# Altium PCB geiger counter.PcbDoc
Units mil, origin at the board's own origin, x right, y up, seen from the top; angles counter-clockwise.
Board outline 2765.94 x 1899.81 mil, 2 copper layers (Top Layer, Bottom Layer), stack 65.792 mil thick; 95 components, 66 nets, 339 pads, 179 vias.
Unrouted connection lines stored in the file: 1.
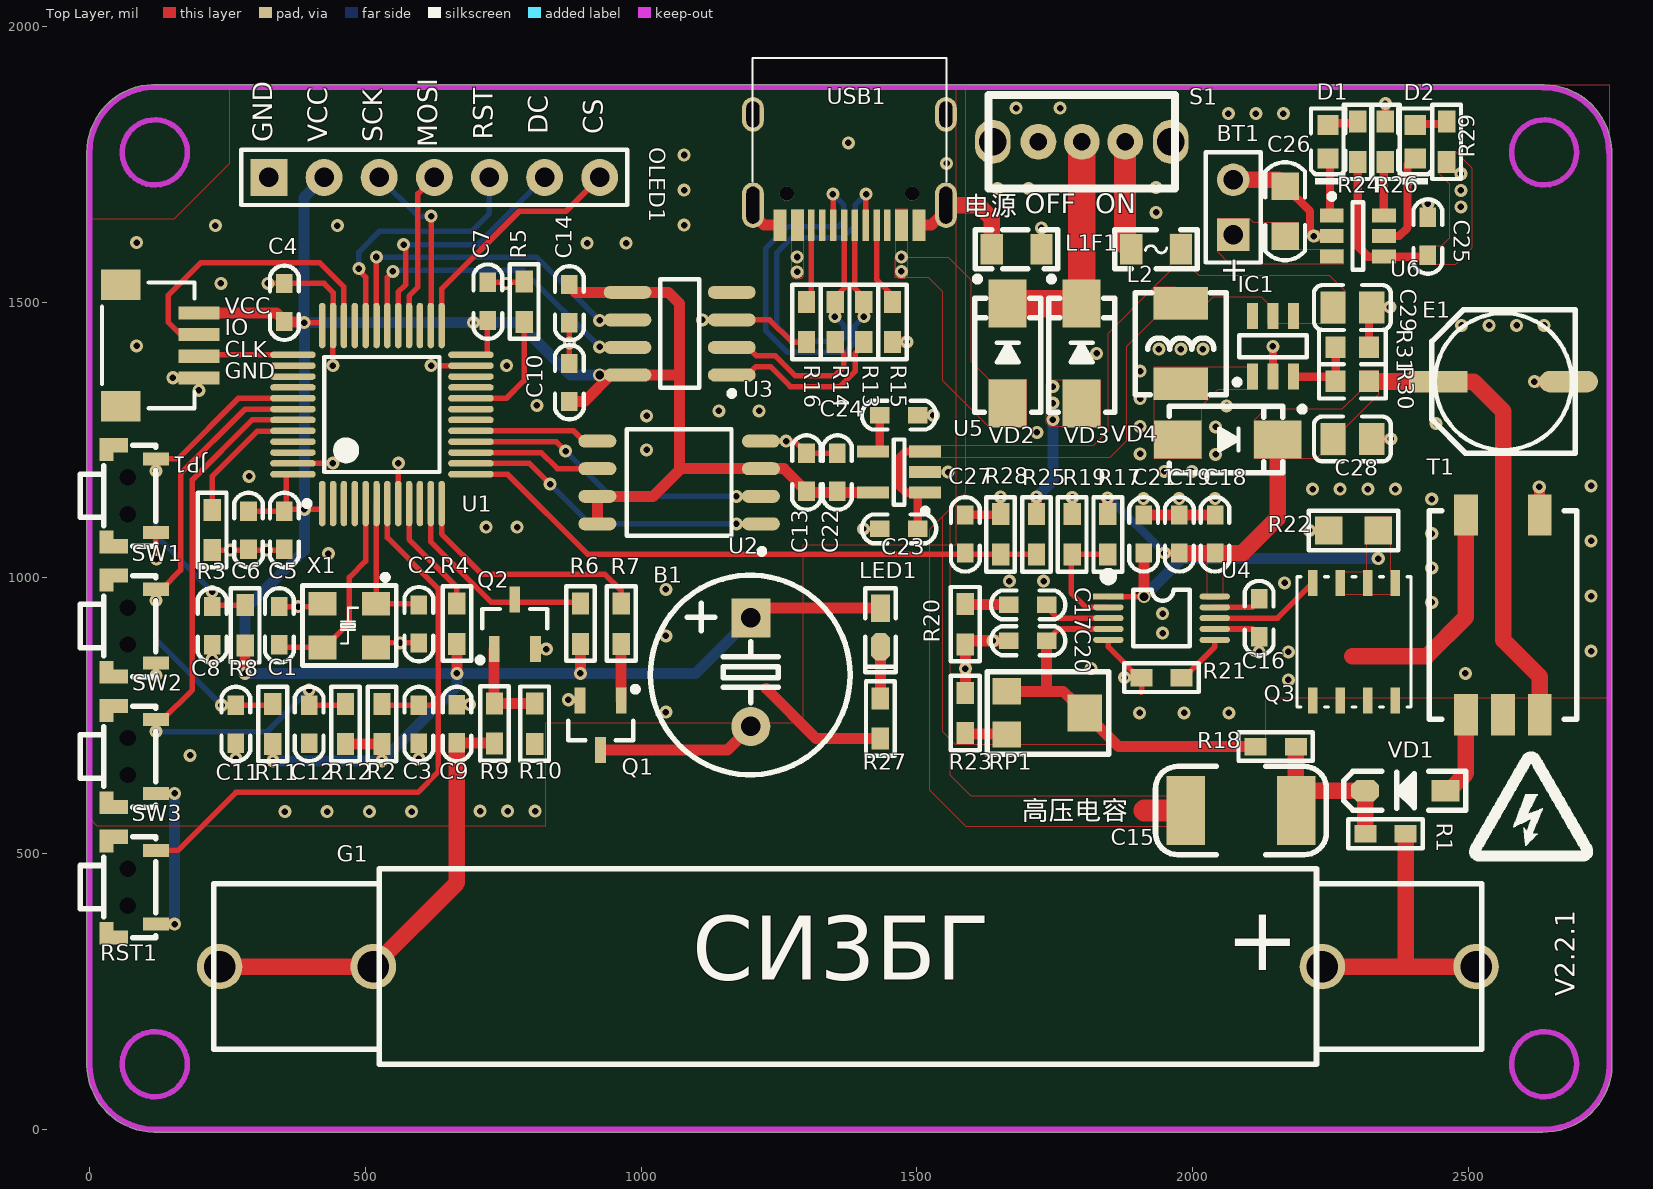
[diagram p0: Top Layer view]
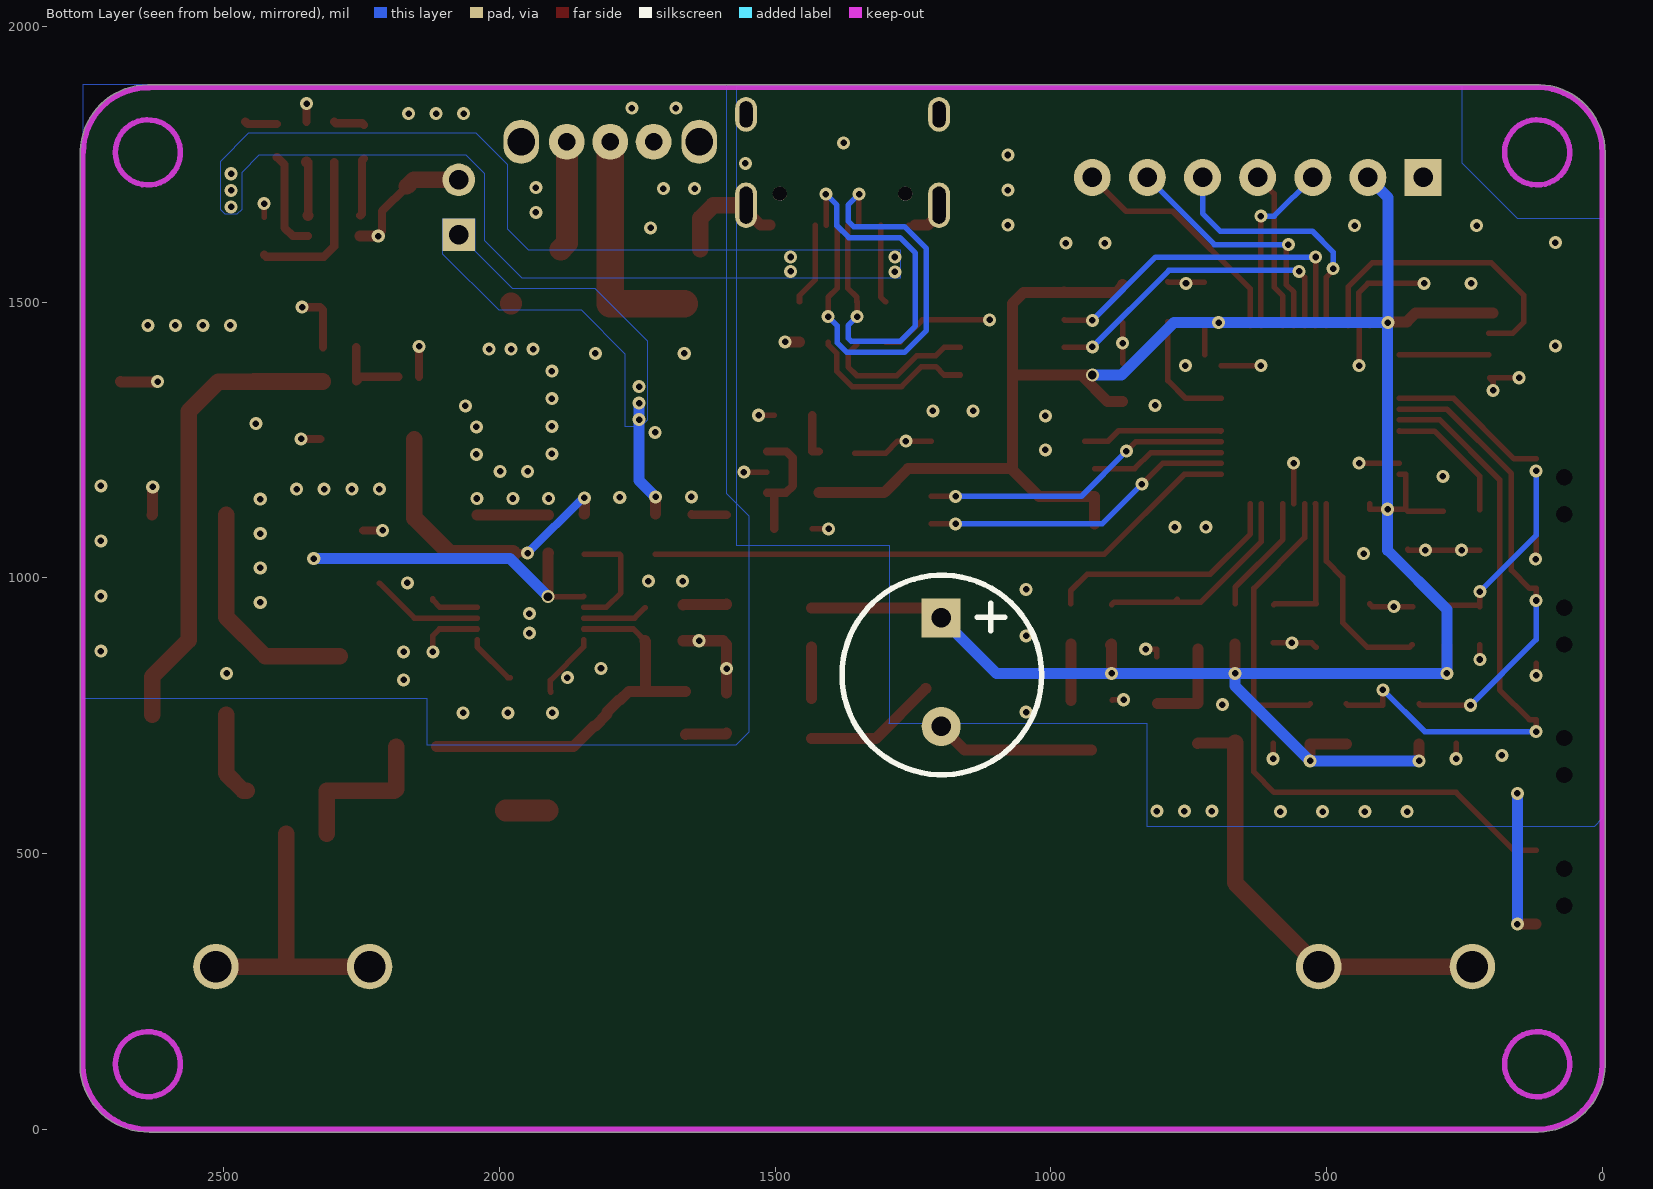
[diagram p1: Bottom Layer view, seen from below]

## Layer stack, top to bottom
Top Solder: solder mask 0.4, Solder Resist, Dk 3.5
Top Layer: signal copper 1.4
Dielectric 1: dielectric 62.9921, FR-4, Dk 4.8
Bottom Layer: signal copper 1.4
Bottom Solder: solder mask 0.4, Solder Resist, Dk 3.5

## Board outline
116.1,-5.01 cw(c118.11,118.11) -5.01,116.08 cw(c118.11,118.11) -5.01,116.18 -5.01,116.26 -5.01,1771.26 -5.01,1771.27 cw(c118.11,1771.65) 114.22,1894.72 cw(c115,1889.76) 115,1894.78 2635.05,1894.78 cw(c2635.05,1889.76) 2637.74,1894 cw(c2637.8,1771.65) 2760.11,1774.39 cw(c2755.91,1771.65) 2760.92,1771.65 2760.92,114.98 cw(c2755.91,114.98) 2760.9,114.55 cw(c2637.8,118.11) 2634.96,-5.01 cw(c2637.8,118.11) 2634.9,-5.01 2635.02,-5.01 119.92,-5.01 ccw(c119.92,0) 120,-5.01 cw(c118.11,118.11) 119.96,-5.01 cw(c118.11,118.11) 119.92,-5.02 cw(c118.11,118.11) 116.26,-5.01 cw(c116.26,0)

## Design rules (kind name [scope] priority, off if disabled: settings)
AssemblyTestPointUsage [All] p0: scope1count=1 scope1_0_kind=Board scope1_0_value=Board scope2count=1 scope2_0_kind=Board scope2_0_value=Board commentlength=0
AssemblyTestpoint [All] p0: scope1count=1 scope1_0_kind=Board scope1_0_value=Board scope2count=1 scope2_0_kind=Board scope2_0_value=Board commentlength=0
Clearance [All] p0: scope1count=1 scope1_0_kind=Board scope1_0_value=Board scope2count=1 scope2_0_kind=Board scope2_0_value=Board commentlength=0 gap=6
Clearance [All] p1: gap=6 ignorepadtopadclearanceinfootprint=FALSE except(0: Arc-Hole Track-Hole SMDPad-Hole THPad-Hole Via-Hole Fill-Hole Poly-Hole Region-Hole Text-Hole; 8: Arc-Fill Arc-Poly Arc-Region Track-Fill Track-Poly Track-Region SMDPad-Fill SMDPad-Poly SMDPad-Region THPad-Fill THPad-Poly THPad-Region Via-Fill Via-Poly Via-Region Fill-Fill Fill-Poly Fill-Region Poly-Poly Poly-Region Region-Region)
ComponentClearance [All] p0: scope1count=1 scope1_0_kind=Board scope1_0_value=Board scope2count=1 scope2_0_kind=Board scope2_0_value=Board commentlength=0 gap=0 collisioncheckmode=3
ComponentClearance [All] p1: gap=0 collisioncheckmode=3 verticalgap=0 showdistances=FALSE
DiffPairsRouting [All] p0: scope1count=1 scope1_0_kind=Board scope1_0_value=Board scope2count=1 scope2_0_kind=Board scope2_0_value=Board commentlength=0
DiffPairsRouting [All] p1: maxlimit=10 minlimit=10 mostfreqgap=10 toplayer_minwidth=10 toplayer_maxwidth=15 toplayer_prefwidth=10 bottomlayer_minwidth=10 bottomlayer_maxwidth=15 bottomlayer_prefwidth=10 maxuncoupledlength=500
FabricationTestPointUsage [All] p0: scope1count=1 scope1_0_kind=Board scope1_0_value=Board scope2count=1 scope2_0_kind=Board scope2_0_value=Board commentlength=0 valid=0 allowmultiple=FALSE
FabricationTestpoint [All] p0: scope1count=1 scope1_0_kind=Board scope1_0_value=Board scope2count=1 scope2_0_kind=Board scope2_0_value=Board commentlength=0 side=3 testpointundercomponent=TRUE minsize=40 maxsize=100 preferedsize=60 minholesize=0 maxholesize=40 preferedholesize=32 testpointgrid=1
FanoutControl Fanout_BGA [All] p0 off: scope1count=1 scope1_0_kind=Board scope1_0_value=Board scope2count=1 scope2_0_kind=Board scope2_0_value=Board commentlength=69 // Protel DXP Scope 1 Expression Was: IsBGA   Fanout_BGA (Default Rule)
FanoutControl Fanout_LCC [All] p0 off: scope1count=1 scope1_0_kind=Board scope1_0_value=Board scope2count=1 scope2_0_kind=Board scope2_0_value=Board commentlength=69 // Protel DXP Scope 1 Expression Was: IsLCC   Fanout_LCC (Default Rule)
FanoutControl Fanout_SOIC [All] p0 off: scope1count=1 scope1_0_kind=Board scope1_0_value=Board scope2count=1 scope2_0_kind=Board scope2_0_value=Board commentlength=71 // Protel DXP Scope 1 Expression Was: IsSOIC   Fanout_SOIC (Default Rule)
FanoutControl Fanout_Small [All] p0 off: scope1count=1 scope1_0_kind=Board scope1_0_value=Board scope2count=1 scope2_0_kind=Board scope2_0_value=Board commentlength=84 // Protel DXP Scope 1 Expression Was: (CompPinCount < 5)   Fanout_Small (Default Rule)
FanoutControl Fanout_Default [All] p0: scope1count=1 scope1_0_kind=Board scope1_0_value=Board scope2count=1 scope2_0_kind=Board scope2_0_value=Board commentlength=30 // Fanout_Default (Default Rule)
Height [All] p0: scope1count=1 scope1_0_kind=Board scope1_0_value=Board scope2count=1 scope2_0_kind=Board scope2_0_value=Board commentlength=0
HoleSize [All] p0: scope1count=1 scope1_0_kind=Board scope1_0_value=Board scope2count=1 scope2_0_kind=Board scope2_0_value=Board commentlength=0 absolutevalues=TRUE maxlimit=100 minlimit=1 maxpercent=80.000 minpercent=20.000
HoleToHoleClearance [All] p0: scope1count=1 scope1_0_kind=Board scope1_0_value=Board scope2count=1 scope2_0_kind=Board scope2_0_value=Board commentlength=0
LayerPairs [All] p0: scope1count=1 scope1_0_kind=Board scope1_0_value=Board scope2count=1 scope2_0_kind=Board scope2_0_value=Board commentlength=0 enforce=TRUE
MinimumSolderMaskSliver [All] p0: scope1count=1 scope1_0_kind=Board scope1_0_value=Board scope2count=1 scope2_0_kind=Board scope2_0_value=Board commentlength=0
MinimumSolderMaskSliver [All] p1: minsoldermaskwidth=0
NetAntennae [All] p0: scope1count=1 scope1_0_kind=Board scope1_0_value=Board scope2count=1 scope2_0_kind=Board scope2_0_value=Board commentlength=0
PasteMaskExpansion [All] p0: scope1count=1 scope1_0_kind=Board scope1_0_value=Board scope2count=1 scope2_0_kind=Board scope2_0_value=Board commentlength=0 expansion=0
PlaneClearance [All] p0: scope1count=1 scope1_0_kind=Board scope1_0_value=Board scope2count=1 scope2_0_kind=Board scope2_0_value=Board commentlength=0 clearance=20
PlaneConnect [All] p0: scope1count=1 scope1_0_kind=Board scope1_0_value=Board scope2count=1 scope2_0_kind=Board scope2_0_value=Board commentlength=0 planeconnectstyle=Relief reliefexpansion=20 reliefentries=4 reliefconductorwidth=10 reliefairgap=10
PolygonConnect PolygonConnect_GND [All] p0: scope1count=1 scope1_0_kind=Board scope1_0_value=Board scope2count=1 scope2_0_kind=Board scope2_0_value=Board commentlength=0 connectstyle=Relief reliefconductorwidth=10 reliefentries=4 polygonreliefangle="90 Angle"
PolygonConnect [All] p0 off: scope1count=1 scope1_0_kind=Board scope1_0_value=Board scope2count=1 scope2_0_kind=Board scope2_0_value=Board commentlength=197 connectstyle=Direct reliefconductorwidth=10 reliefentries=4 polygonreliefangle="90 Angle" // Protel DXP Scope 1 Expression Was: (InNet('3.3V') OR InNet('NetF1_1') OR InNet('VIN') OR InNet('VUSB') OR InNet('5V') OR InNet('VCC') OR InNet('NetIC1_1') OR InNet('VBAT') OR InNet('NetC21_2'))
PolygonConnect [(InNet('3.3V') OR InNet('NetF1_1') OR InNet('VIN') OR InNet('VUSB') OR InNet('5V') OR InNet('VCC') OR InNet('NetIC1_1') OR InNet('VBAT') OR InNet('NetC21_2'))] p1: connectstyle=Direct reliefconductorwidth=10 reliefentries=4 polygonreliefangle="90 Angle" airgapwidth=10
PolygonConnect PolygonConnect_GND [All] p2: thpad.connectstyle=Relief thpad.reliefconductorwidth=10 thpad.reliefentries=4 thpad.polygonreliefangle="90 Angle" thpad.airgapwidth=10 smdpad.connectstyle=Relief smdpad.reliefconductorwidth=10 smdpad.reliefentries=4 smdpad.polygonreliefangle="90 Angle" smdpad.airgapwidth=10 via.connectstyle=Direct via.reliefconductorwidth=10 via.reliefentries=4 via.polygonreliefangle="90 Angle" via.airgapwidth=10
RoutingCorners [All] p0: scope1count=1 scope1_0_kind=Board scope1_0_value=Board scope2count=1 scope2_0_kind=Board scope2_0_value=Board commentlength=0 cornerstyle=45-Degree minsetback=100 maxsetback=100
RoutingLayers [All] p0: scope1count=1 scope1_0_kind=Board scope1_0_value=Board scope2count=1 scope2_0_kind=Board scope2_0_value=Board commentlength=0 top layer=Automatic bottom layer=Automatic
RoutingPriority [All] p0: scope1count=1 scope1_0_kind=Board scope1_0_value=Board scope2count=1 scope2_0_kind=Board scope2_0_value=Board commentlength=0
RoutingTopology [All] p0: scope1count=1 scope1_0_kind=Board scope1_0_value=Board scope2count=1 scope2_0_kind=Board scope2_0_value=Board commentlength=0 topology=Shortest
RoutingVias [All] p0: scope1count=1 scope1_0_kind=Board scope1_0_value=Board scope2count=1 scope2_0_kind=Board scope2_0_value=Board commentlength=0 holewidth=11.81 width=23.62 viastyle="Through Hole" minholewidth=11.81 minwidth=23.62 maxholewidth=28 maxwidth=50
RoutingVias [All] p1: holewidth=11.81 width=23.62 viastyle="Through Hole" minholewidth=11.81 minwidth=23.62 maxholewidth=28 maxwidth=50
ShortCircuit [All] p0: scope1count=1 scope1_0_kind=Board scope1_0_value=Board scope2count=1 scope2_0_kind=Board scope2_0_value=Board commentlength=0 allowed=FALSE
SilkToBoardRegionClearance [All] p0: scope1count=1 scope1_0_kind=Board scope1_0_value=Board scope2count=1 scope2_0_kind=Board scope2_0_value=Board commentlength=0
SilkToSilkClearance [All] p0: scope1count=1 scope1_0_kind=Board scope1_0_value=Board scope2count=1 scope2_0_kind=Board scope2_0_value=Board commentlength=0
SilkToSilkClearance [All] p1: silktosilkclearance=0
SilkToSolderMaskClearance [All] p0 off: scope1count=1 scope1_0_kind=Board scope1_0_value=Board scope2count=1 scope2_0_kind=Board scope2_0_value=Board commentlength=44 // Protel DXP Scope 1 Expression Was: IsPad
SilkToSolderMaskClearance [IsPad] p1: minsilkscreentomaskgap=0 clearancetoexposedcopper=TRUE
SolderMaskExpansion [All] p0: scope1count=1 scope1_0_kind=Board scope1_0_value=Board scope2count=1 scope2_0_kind=Board scope2_0_value=Board commentlength=0 expansion=4
SolderMaskExpansion [All] p1: expansion=4
UnRoutedNet [All] p0: scope1count=1 scope1_0_kind=Board scope1_0_value=Board scope2count=1 scope2_0_kind=Board scope2_0_value=Board commentlength=0
UnpouredPolygon [All] p0: scope1count=1 scope1_0_kind=Board scope1_0_value=Board scope2count=1 scope2_0_kind=Board scope2_0_value=Board commentlength=0
Width [All] p0: scope1count=1 scope1_0_kind=Board scope1_0_value=Board scope2count=1 scope2_0_kind=Board scope2_0_value=Board commentlength=0 maxlimit=100 minlimit=6 preferedwidth=10
Width [All] p1: maxlimit=100 minlimit=6 preferedwidth=10
25 further rules are at their usual default settings.

## Classes and differential pairs
component class POWER: BT1 C15 C16 C17 C18 C19 C20 C21 C22 C23 C24 C25 C26 C27 C28 C29 D1 D2 E1 F1 IC1 L2 LED1 Q3 R17 R18 R19 R20 R21 R22 R23 R24 R25 R26 R27 R28 R29 R30 R31 RP1 S1 T1 U4 U5 U6 VD1 VD2 VD3 VD4
component class 盖革计数器: A B1 C1 C2 C3 C4 C5 C6 C7 C8 C9 C10 C11 C12 C13 C14 G1 JP1 L1 OLED1 Q1 Q2 R1 R2 R3 R4 R5 R6 R7 R8 R9 R10 R11 R12 R13 R14 R15 R16 RST1 SW1 SW2 SW3 U1 U2 U3 USB1 X1
differential pair D: +D_P -D_N
differential pair " ": +UD_P -UD_N

## Components (designator, comment, footprint, x,y, rotation, side; value= is the part's Value field where it differs from the comment)
B1 "DC5V" "BEEP 5x9x5.5" 1199,829 r180 top
BT1 "Battery 3.7V" BAT-2 2074,1672 r90 top
C1 "22" "C 0603" 344,914 r90 top
C2 "22" "C 0603" 597,916 r270 top
C3 "104" "C 0603" 597,735 r90 top
C4 "104" "C 0603" 353,1499 r270 top
C5 "104" "C 0603" 353,1087 r90 top
C6 "104" "C 0603" 288,1087 r90 top
C7 "104" "C 0603" 722,1501 r270 top
C8 "104" "C 0603" 221.94,914 r90 top
C9 "220pF" "C 0603" 666.06,735 r270 top
C10 "103" "C 0603" 870,1355 r90 top
C11 "104" "C 0603" 265,735 r90 top
C12 "104" "C 0603" 398,735 r90 top
C13 "104" "C 0603" 1300,1191 r270 top
C14 "104" "C 0603" 870,1498 r90 top
C15 "1uF" "C 1812" 2088,578 r0 top
C16 "1uF" "C 0603" 2121,927 r270 top
C17 "22nF" "C 0603" 1702,951 r0 top
C18 "100nF" "C 0603" 2041,1079 r270 top
C19 "100nF" "C 0603" 1976.31,1079 r270 top
C20 "10pF" "C 0603" 1702,886 r0 top
C21 "1nF" "C 0603" 1911.62,1079 r270 top
C22 "105" "C 0603" 1356,1191 r270 top
C23 "105" "C 0603" 1468,1089 r0 top
C24 "103" "C 0603" 1468,1295 r0 top
C25 "105" "C 0603" 2427,1619 r270 top
C26 "10uF" "C 0805" 2168,1665 r270 top
C27 "104" "C 0603" 1588,1079 r270 top
C28 "22uF (226) 20% 25V" 0805_C 2290.04,1252 r180 top
C29 "22uF (226) 20% 25V" 0805_C 2290.04,1490.45 r180 top
D1 "红灯 0603" 0603_LED_S1 2246,1791 r90 top
D2 "绿灯 0603" 0603_LED_S1 2404,1791 r90 top
E1 "100uF/16V" "CM D(6.3*5.4)" 2564,1356 r180 top
F1 "0.5A" "FU 0805" 1934,1596 r0 top
G1 "盖革管" "SI3BG 2" 1375,295 r0 top
IC1 "SX1308" SOT23-6N 2146,1420 r0 top
JP1 "HDR-1X4" SH1.0-4P-L 127.14,1421.69 r270 top
L1 "10um" "L 0805" 1681,1596 r0 top
L2 "4.7uH" "L 04020" 1979,1425 r90 top
LED1 "红色" "LED 0603W" 1434,910 r270 top
OLED1 "OLE 0.96-12864-7Pin" HDR-1X7_M 325,1726.26 r0 top locked
Q1 "S9013" SOT23-3N 926.6,733 r180 top
Q2 "S9013" SOT23-3N 771,916 r0 top
Q3 "IRFH7440TRPBF" PQFN8_5X6_B_INF 2293,884 r270 top
R1 "2M" "R 0603" 2350,536 r0 top
R2 "10K" "R 0603" 530,735 r90 top
R3 "10K" "R 0603" 222,1087 r90 top
R4 "0" "R 0603" 666,917 r90 top
R5 "10K" "R 0603" 788,1501 r90 top
R6 "10K" "R 0603" 890,917 r270 top
R7 "1K" "R 0603" 964,917 r90 top
R8 "10K" "R 0603" 282,914 r90 top
R9 "22K" "R 0603" 734.03,736 r90 top
R10 "100K" "R 0603" 807,735.5 r90 top
R11 "10K" "R 0603" 332,735 r90 top
R12 "10K" "R 0603" 464,735.04 r90 top
R13 "10" "R 0603" 1404,1464 r270 top
R14 "10" "R 0603" 1352,1464 r270 top
R15 "5.1K" "R 0603" 1456,1464 r270 top
R16 "5.1K" "R 0603" 1300,1464 r270 top
R17 "121K" "R 0603" 1846.5,1079 r270 top
R18 "10M" "R 0603" 2151,694 r0 top
R19 "121K" "R 0603" 1781.88,1079 r270 top
R20 "40.2K" "R 0603" 1588,916 r90 top
R21 "220K" "R 0603" 1944,819 r0 top
R22 "0.02" "R 0805" 2292,1086 r0 top
R23 "20K" "R 0603" 1588,755 r270 top
R24 "4.7K" "R 0603" 2300,1791 r270 top
R25 "4.7K" "R 0603" 1717.25,1079 r90 top
R26 "3K" "R 0603" 2350,1791 r90 top
R27 "1K" "R 0603" 1434,745 r270 top
R28 "1K" "R 0603" 1652,1079 r270 top
R29 "4.7K" "R 0603" 2461,1791 r270 top
R30 "110KΩ (1103) ±1%" 0603_R 2290,1356.45 r0 top
R31 "15KΩ (1502) ±1%" 0603_R 2290,1418.45 r180 top
RP1 "10K" 3303W 1734,755 r270 top
RST1 "TSW" "TSW 2*4*3.5-S-W" 69,439 r90 top
S1 "SS-12F23" SS-12D07 1799.26,1791 r180 top
SW1 "TSW" "TSW 2*4*3.5-S-W" 69,1149 r90 top
SW2 "TSW" "TSW 2*4*3.5-S-W" 69,912.5 r90 top
SW3 "TSW" "TSW 2*4*3.5-S-W" 69,676 r90 top
T1 "TTRN-060S-013-T" EE5.0 2563,933 r0 top
U1 "STM32F103C" LQFP-48_M 530,1296.26 r90 top locked
U2 "W25QXX" SOIC8_W 1069,1173 r180 top
U3 "CH330" SOIC8_N 1070,1443 r180 top
U4 "LM3481" VSSOP10 1944,927 r270 top
U5 "SGM2028-3.3YN5G" SOT23-5 1468,1192 r180 top
U6 "TP4059" SOT23-6_N 2300,1620 r0 top
USB1 "USB" USB-C/16P 1377.95,1799.21 r180 top locked
VD1 "E1J" SOD-123F 2386,614 r180 top
VD2 "SS54" SMA 1665,1407 r90 top
VD3 "SS54" SMA 1799,1407 r90 top locked
VD4 "SS34" SMA 2064,1251 r0 top
X1 "8M" XTAL-3225 516,951 r270 top

## Footprints (in the part's own frame and the unit in brackets; to place one, negate y for a bottom-side part, rotate by r counter-clockwise, add the part's x,y. Pads: shape width x height; smd on the part's side, far side on the other; paste and mask are expansions set on the pad)
0603_LED_S1 [mm]
  rect 0.93x0.98 smd: A(0.77,0) K(-0.77,0)
  silkscreen extent -1.98,-0.79 1.54,0.79
0603_R [mm]
  rect 0.93x0.98 smd: 1(-0.77,0) 2(0.77,0)
  silkscreen extent -1.53,-0.79 1.54,0.79
0805_C [mm]
  rect 1.16x1.47 smd: 1(-0.89,0) 2(0.89,0)
  silkscreen extent -1.77,-1.04 1.77,1.04
3303W [mm] "3.5*3.1*1.5mm"
  rect 1.2x1.3 smd: 1(-1,-1.8) 3(1,-1.8)
  rect 1.7x1.6 smd: 2(0,1.8)
  silkscreen extent -1.9,-2.7 1.9,2.9
BAT-2 [mm] "Battery; 2 Leads"
  rect 1.5x1.5 hole 0.9: 1(-1.27,0)
  round 1.5 hole 0.9: 2(1.27,0)
  silkscreen extent -2.54,-1.27 2.54,1.27
"BEEP 5x9x5.5" [mm] "5*9*5.5mm(脚距,直径,高度)"
  rect 1.8x1.8 hole 0.9: 1(0,-2.5)
  round 1.8 hole 0.9: 2(0,2.5)
  silkscreen extent -4.58,-4.47 4.62,4.72
"C 0603" [mil] "无极性贴片电容"
  rect 35x30 smd: 1(-35,0) 2(34,0)
  silkscreen extent -67,-26 67,26
"C 0805" [mil] "无极性贴片电容"
  rect 50x50 smd: 1(-45,0) 2(45,0)
  silkscreen extent -89,-36 89,36
"C 1812" [mil] "无极性贴片电容"
  rect 70x125 smd: 1(-100,0) 2(100,0)
  silkscreen extent -155,-80 155,80
"CM D(6.3*5.4)" [mm] "贴片电解电容，直径6.3mm，高5.4mm"
  rect 2.7x1 smd: 1(3,0)
  oval 2.7x1 smd: 2(-3,0)
  silkscreen extent -3.3,-3.3 3.3,3.3
EE5.0 [mm] "贴片变压器"
  rect 1.1x1.9 smd: 1(1.7,-4.6) 2(-1.7,4.6) 3(-1.7,-4.6) 4(1.7,4.6) NC(0,-4.6)
  silkscreen extent -3.4,-4.8 3.4,4.8
"FU 0805" [mil] "贴片保险丝"
  rect 40x55 smd: 1(-45,0) 2(45,0)
  silkscreen extent -75,-35 75,35
HDR-1X7_M [mm] "排母，7脚"
  rect 1.7x1.7 hole 0.9: 1(0,0)
  round 1.7 hole 0.9: 2(2.54,0) 3(5.08,0) 4(7.62,0) 5(10.16,0) 6(12.7,0) 7(15.24,0)
  silkscreen extent -1.27,-1.27 16.51,1.27
"L 0805" [mil] "小功率贴片电感"
  rect 40x55 smd: 1(-45,0) 2(45,0)
  silkscreen extent -75,-35 75,35
"L 04020" [mm] "4.1mm*4.6mm*2.0mm"
  rect 1.5x2.5 smd: 1(-1.85,0) 2(1.85,0)
  silkscreen extent -2.35,-2.1 2.35,2.1
"LED 0603W" [mil] "白色0603LED"
  rect 50x35 smd: 1(-35,0.26)
  oct 50x35 smd: 2(35,0.26)
  silkscreen extent -71,-28 81,28
LQFP-48_M [mm] "Thin QFP, 48-Leads, Body 7x7mm, Pitch 0.5mm, IPC Low Density"
  oval 2.1x0.3 smd: 1(-4.1,2.75) 2(-4.1,2.25) 3(-4.1,1.75) 4(-4.1,1.25) 5(-4.1,0.75) 6(-4.1,0.25) 7(-4.1,-0.25) 8(-4.1,-0.75) 9(-4.1,-1.25) 10(-4.1,-1.75) 11(-4.1,-2.25) 12(-4.1,-2.75) 25(4.1,-2.75) 26(4.1,-2.25) 27(4.1,-1.75) 28(4.1,-1.25) 29(4.1,-0.75) 30(4.1,-0.25) 31(4.1,0.25) 32(4.1,0.75) 33(4.1,1.25) 34(4.1,1.75) 35(4.1,2.25) 36(4.1,2.75)
  oval 0.3x2.1 smd: 13(-2.75,-4.1) 14(-2.25,-4.1) 15(-1.75,-4.1) 16(-1.25,-4.1) 17(-0.75,-4.1) 18(-0.25,-4.1) 19(0.25,-4.1) 20(0.75,-4.1) 21(1.25,-4.1) 22(1.75,-4.1) 23(2.25,-4.1) 24(2.75,-4.1) 37(2.75,4.1) 38(2.25,4.1) 39(1.75,4.1) 40(1.25,4.1) 41(0.75,4.1) 42(0.25,4.1) 43(-0.25,4.1) 44(-0.75,4.1) 45(-1.25,4.1) 46(-1.75,4.1) 47(-2.25,4.1) 48(-2.75,4.1)
  silkscreen extent -4.22,-2.65 2.65,3.57
PQFN8_5X6_B_INF [mil]
  rect 47x17 smd paste+0 mask+0: 1(-106.5,75) 2(-106.5,25) 3(-106.5,-25) 4(-106.5,-75) 5(106.5,-75) 6(106.5,-25) 7(106.5,25) 8(106.5,75)
  silkscreen extent -118,-104 118,104
"R 0603" [mil] "1/10W贴片电阻"
  rect 40x31.5 smd: 1(-36.5,0) 2(36.5,0)
  silkscreen extent -68,-26 68,26
"R 0805" [mil] "1/8W贴片电阻"
  rect 50x50 smd: 1(-45,0) 2(45,0)
  silkscreen extent -81,-36 81,36
SH1.0-4P-L [mm]
  rect 1.4x1.8 smd: 0(-2.8,-1.8) 0(2.8,-1.8)
  rect 0.6x1.9 smd: 1(-1.5,1.8) 2(-0.5,1.8) 3(0.5,1.8) 4(1.5,1.8)
  silkscreen extent -2.9,-2.67 2.9,1.6
"SI3BG 2" [mm] "小型高量程盖革计数管SI3BG"
  round 2.1 hole 1.45: 1(21.86,0) 1(28.94,0) 2(-28.94,0) 2(-21.86,0)
  silkscreen extent -29.21,-4.5 29.21,4.5
SMA [mm] "4.5x2.6*2.2mm（长宽高，不包括引脚）"
  rect 2.2x1.75 smd: 1(-2.3,0) 2(2.3,0)
  silkscreen extent -2.7,-1.52 3.56,1.52
SOD-123F [mm] "2.7x1.6X1.1mm（长宽高，不包括引脚）"
  rect 1.3x1 smd: 1(-1.85,0)
  oct 1.3x1 smd: 2(1.85,0)
  silkscreen extent -2.79,-0.89 2.84,0.89
SOIC8_N [mm] "8-Pin Small Outline Integrated Circuit Package (SOIC8), IPC Medium Density"
  oval 2.2x0.6 smd: 1(-2.4,1.905) 2(-2.4,0.635) 3(-2.4,-0.635) 4(-2.4,-1.905) 5(2.4,-1.905) 6(2.4,-0.635) 7(2.4,0.635) 8(2.4,1.905)
  silkscreen extent -2.53,-2.5 0.9,2.88
SOIC8_W [mm] "SPI_FLASH"
  oval 1.75x0.6 smd: 1(-3.768,1.905) 2(-3.768,0.635) 3(-3.768,-0.635) 4(-3.768,-1.905) 5(3.768,-1.905) 6(3.768,-0.635) 7(3.768,0.635) 8(3.768,1.905)
  silkscreen extent -3.93,-2.45 2.41,3.3
SOT23-3N [mm] "3x1.3x1mm(长宽高)"
  rect 0.5x1.2 smd: 1(-0.95,-1.143) 2(0.95,-1.143) 3(0,1.143)
  silkscreen extent -1.73,-1.78 1.5,0.7
SOT23-5 [mil]
  rect 58x22 smd: 1(-47,37.4) 2(-47,0) 3(-47,-37.4) 4(47,-37.4) 5(47,37.4)
  silkscreen extent -52,-59 10,76
SOT23-6_N [mm] "SOT23, 6-Leads, Body 2.9x1.6mm, Pitch 0.95mm, Lead Span 2.7mm, IPC Medium Density"
  rect 1.1x0.65 smd: 1(-1.2,0.95) 2(-1.2,0) 3(-1.2,-0.95) 4(1.2,-0.95) 5(1.2,0) 6(1.2,0.95)
  silkscreen extent -1.32,-1.55 0.25,1.95
SOT23-6N [mm] "3x1.6x1.1mm(长宽高)"
  rect 0.5x1.2 smd: 1(-0.95,-1.4) 2(0,-1.4) 3(0.95,-1.4) 4(0.95,1.4) 5(0,1.4) 6(-0.95,1.4)
  silkscreen extent -1.78,-1.78 1.55,0.51
SS-12D07 [mil]
  round 65 hole 31.5: 1(-78.74,0) 2(0,0) 3(78.74,0)
  oval 65x80 hole 49.21: 4(-161.42,0) 5(161.42,0)
  silkscreen extent -169,-85 169,85
"TSW 2*4*3.5-S-W" [mm] "侧立贴片2*4*3.5"
  rect 0.65x1.3 smd: 0(-2.325,0.65) 0(2.325,0.65)
  rect 0.4x0.65 smd: 0(-1.8,0.975) 0(1.8,0.975)
  round 0 hole 0.75: 0(-0.85,0) 0(0.85,0)
  rect 0.6x1.2 smd: 1(-1.7,-1.3) 2(1.7,-1.3)
  silkscreen extent -2.32,-1.3 2.32,2.2
USB-C/16P [mm] "贴片16P USB TYPE-C母座"
  round 0.65 hole 0.65: 1(-2.89,2.6) 1(2.89,2.6)
  oval 1x2.1 hole 1.7 slot 0.6 at 0 deg: A1(-4.445,3.13) A12(4.445,3.13)
  oval 1x1.6 hole 1.2 slot 0.6 at 0 deg: A1(-4.445,-1.05) A12(4.445,-1.05)
  rect 0.3x1.45 smd: A1(-3.35,4.045) A4(-2.55,4.045) A5(-1.25,4.045) A6(-0.25,4.045) A7(0.25,4.045) A8(1.25,4.045) A9(2.55,4.045) A12(3.35,4.045) B1(3.05,4.045) B4(2.25,4.045) B5(1.75,4.045) B6(0.75,4.045) B7(-0.75,4.045) B8(-1.75,4.045) B9(-2.25,4.045) B12(-3.05,4.045)
  silkscreen extent -4.47,-3.65 4.47,2.03
VSSOP10 [mm] "塑封体长3mm，宽3mm，脚距0.5"
  rect 0.28x1.4 smd: 1(-1,-2.45)
  oval 0.28x1.4 smd: 2(-0.5,-2.45) 3(0,-2.45) 4(0.5,-2.45) 5(1,-2.45) 6(1,2.45) 7(0.5,2.45) 8(0,2.45) 9(-0.5,2.45) 10(-1,2.45)
  silkscreen extent -2.07,-2.6 1.3,1.3
XTAL-3225 [mil]
  rect 43.31x51.18 smd: 1(-2,3) 2(-2,-94) 3(77,-94) 4(77,3)
  silkscreen extent -55,-130 110,40

## Part data
B1: library part BEEP, "蜂鸣器"
BT1: library part Battery, "Multicell Battery"
C1 C2 C3 C4 C5 C6 C7 C8 C9 C10 C11 C12 C13 C14 C15 C16 C17 C18 C19 C20 C21 C22 C23 C24 C25 C26 C27: library part C, "无极性贴片电容"
C28 C29: library part "0805 22uF (226) 20% 25V", "贴片电容"
D1: library part "0603 红灯", "发光二极管"
D2: library part "0603 绿灯", "发光二极管"
E1: library part C-CM, "贴片电解电容"
F1: library part FU, "贴片保险丝"
G1: "小型高量程SI3BG GM管"
IC1: "可调升压芯片"
JP1: library part "Header 4", "4P接插件"
L1: library part L, "小功率贴片电感"
L2: library part L-CDRH, "功率屏蔽电感"
LED1: library part LED-SMD, "贴片LED"
Q1 Q2: library part 9013-SMD, "低频放大-NPN型"
Q3: "40V/159A N沟道MOS管"
R1 R2 R3 R4 R5 R6 R7 R8 R9 R10 R11 R12 R13 R14 R15 R16 R17 R18 R19 R20 R21 R22 R23 R24 R25 R26 R27 R28 R29: library part R, "贴片电阻"
R30: library part "0603 110KΩ (1103) 1%", "贴片电阻"
R31: library part "0603 15KΩ (1502) 1%", "贴片电阻"
RP1: library part RP-SMD, "贴片电位器"
RST1 SW1 SW2 SW3: library part "TSW SMD", "轻触开关"
S1: library part SSW-1P, "1路拨动开关"
T1: "1:10.5 3.2A 贴片闪光灯变压器"
U1: "STM32单片机48引脚"
U2: "SPI FLASH"
U4: "High-Efficiency Controller for Boost, SEPIC and Flyback DC-DC Converters"
U5: "500mA,3.3V低压差线性稳压器"
U6: "600mA单节锂电池充电芯片"
USB1: library part USB-C/16P, "USB-C型母口16P/12P"
VD1: "600V/1A 超快恢复二极管"
VD2 VD3 VD4: library part SS14, "肖特基二极管"
X1: library part XTAL-4, "4脚晶振"

## Via types
v1: diameter 23.62, hole 11.81, Top Layer to Bottom Layer, tented both sides, 177 vias
v2: diameter 23.62, hole 15.75, Top Layer to Bottom Layer, tented both sides, 2 vias

## Nets (pads, with @x,y where several pads share a name; then routed paths per layer and width w, separated by ;. In a path a pad name is that pad's centre, name@x,y a point inside that pad or via, vN(x,y) a via of type N, cw(c..) or ccw(c..) an arc to the next point about the centre after c; other vN are vias at no path point)
3.3V: B1.1 C4.2 C5.2 C6.2 C7.2 C10.1 C13.2 C14.2 C22.2 JP1.1 LED1.1 OLED1.2 R2.1 R4.1 R6.2 R8.1 R11.1 R12.1 U1.1 U1.24 U1.36 U1.48 U2.3 U2.7 U2.8 U3.5 U3.8 U5.5 | length 5277.8
  Top Layer w10: C6.2 C5.2 C5.2@356.5,1124.5 ; U1.48 356.5,1187.99 C5.2@356.5,1124.5 ; v1(389,1463) 420.9,1463 421.73,1462.16 U1.36 ; U1.1 421.73,1124.5 v1(389.12,1124.5) C5.2@356.5,1124.5 ; v1(696,1463) 718,1463 C7.2 ; U1.24@720.93,1405 C7.2@720.93,1462.93
  Top Layer w20: JP1.1 338.44,1480.74 353,1466.18 C4.2 354.31,1463.69 388.31,1463.69 v1(389,1463) ; v1(282,827) R8.1 ; v1(332,668) R11.1 ; R12.1 529.98,698.52 v1(530,668) ; v1(666,827) R4.1 ; C10.1 897,1320 U3.8@945,1368 ; C14.2 870,1529.5 881.5,1518 U3.5 1050,1518 1070,1498 1070,1369 ; v1@889.76,826.76 v1(890,827) 890,876.5 892,878.5 R6.2 ; U2.8 U2.7 1022,1148 1070,1196 ; v2(925,1368) U3.8@945,1368 ; 1235.43,945 LED1.1 ; U5.5 1302.4,1154.6 C13.2 1259,1198 U2.3 1072,1198 ccw(c1072,1196) 1070,1196 ; U3.8@945,1368 U3.8 1069,1368 ccw(c1069,1369) 1070,1369 ; 1070,1196 1070,1369
  Bottom Layer w20: v1(332,668) v1(530,668) 666,804 v1(666,827) ; OLED1.2 389,1690.26 v1(389,1463) ; v2@921,1368 872,1368 777,1463 v1(696,1463) v1(389,1463) ; B1.1 1098.57,827 v1(890,827) v1(666,827) ; v1(389,1463) 389.12,1462.88 v1(389.12,1124.5) 389.12,1050.12 282,943 v1(282,827) v1(666,827)
5V: C18.2 C19.2 C28.2 E1.1 R17.1 R30.2 T1.1 U4.10 VD4.2 | length 1392.1
  Top Layer w15: v1(1949,1045) C19.2
  Top Layer w20: v1(1846,1145) 1846.25,1144.75 1846.25,1115.75 R17.1
  Top Layer w30: C19.2 C18.2 2091,1045 2154.55,1108.55 VD4.2 ; R30.2 2320.54,1356.22 2445.67,1356.22 E1.1 2510,1356 2564,1302 2564,887 2629.93,821.07 T1.1
  Bottom Layer w15: v1(1846,1145) 1849,1145 v1(1949,1045)
AGND: BT1.2 C15.1 C16.2 C18.1 C19.1 C20.1 C21.1 C25.1 C26.1 C27.1 C28.1 C29.1 E1.2 IC1.2 L1.2 R19.1 R20.1 R21.1 R22.1 R23.1 R26.2 R28.1 R31.1 T1.4 U4.5 U4.7 U6.2 | length 1325.2
  Top Layer w10: U4.5 1847.54,874.7 1908,814.25 1908,795 1907,794 1907,793 ; U4.7 2109.18,907.32 2121,895.5 C16.2 v1(2121,866) ; C25.1 v1(2427,1678.74)
  Top Layer w15: C27.1 1588.75,1114.75 1651.25,1114.75 R28.1 ; IC1.2 v1(2146,1420) ; C26.1 2213,1665 2213,1629.33 2220,1622.33 v1(2220,1620) ; v1(2212,1086) R22.1 ; R31.1 2320.31,1485.68 C29.1 2325.63,1491 v1(2358,1491) ; C28.1 v1(2360,1252) ; R26.2 v1(2350,1860)
  Top Layer w20: R23.1 v1(1588,835.5) R20.1 1594.5,886 v1(1638,886) C20.1 ; C21.1 C19.1 C18.1 ; v1(2220,1620) U6.2 ; v1(2620,1356) 2620.5,1355.5 2686.61,1355.5 E1.2@2687.11,1356 ; v1(2629,1165) 2629.46,1164.54 2629.46,1114.57 T1.4
  Top Layer w30: BT1.2 2156,1722 C26.1
  Top Layer w40: 1913,578 C15.1
  other v1: 1904,755 1985,755 2066,755 2174,815 1877,819 2495,827 1816,836 2174,866 2723,867 1946,900 1946,935 2434,955.5 2723,967 2167,991 1668,994 1730,994 2434,1018 2723,1067 2434,1080.5 2434,1143 1911,1144 1976,1144 2041,1144 1782,1146 1652,1147 2218,1161 2268,1161 2318,1161 2368,1161 2723,1167 1949,1193 1999,1193 2042,1224 1905,1225 1718,1264 2042,1274 1905,1275 2442,1280 2062,1312 1905,1325 1905,1375 1665,1407 1826,1407 1939,1415 1979,1415 2019,1415 2488,1458 2538,1458 2588,1458 2638,1458 1726,1635 1934,1663 1646,1706 1703,1706 1934,1708 2065,1842 2115,1842 2165,1842 1680,1852 1760,1852
BEEP: R7.2 U1.12 | length 446.9
  Top Layer w10: U1.12 638.27,1079.73 711,1007 934,1007 964,977 R7.2
COUNT: Q2.3 R6.1 U1.11 | length 394.9
  Top Layer w10: U1.11 618.58,1065.42 727.84,956.16 Q2.3@775.84,956.16 ; Q2.3 Q2.3@775.84,956.16 ; R6.1@890,951.5 885.34,956.16 Q2.3@775.84,956.16
D_N: R14.1 USB1.A7 USB1.B7 | length 774.9
  Top Layer w10: v1@1351.5,1471 v1(1351.5,1474) 1351.5,1501 R14.1 1352,1509 1368.11,1525.11 USB1.A7 ; USB1.B7 1407.74,1640.22 1407.74,1695.74 v1(1408,1696)
  Bottom Layer w10: v1(1351.5,1474) 1367.75,1457.75 1367.75,1434.86 1361.89,1429 1274,1429 1246,1457 1246,1589 1274,1617 1366.28,1617 1388,1638.72 1388,1676 v1(1408,1696)
D_P: R13.1 USB1.A6 USB1.B6 | length 837
  Top Layer w10: v1(1348,1696) 1348,1690 1348.43,1689.57 USB1.B6 ; USB1.A6 1387.8,1525.2 1404,1509 R13.1 v1(1404,1474)
  Bottom Layer w10: v1(1348,1696) 1368,1676 1368,1647 1358,1637 1265.72,1637 1226,1597.28 1226,1448.72 1265.72,1409 1370.18,1409 1387.75,1426.57 1387.75,1457.75 v1(1404,1474)
GND: C1.2 C2.2 C3.1 C4.1 C5.1 C6.1 C7.1 C8.1 C9.1 C10.2 C11.1 C12.1 C13.1 C14.1 C22.1 C23.1 C24.2 JP1.4 L1.1 OLED1.1 Q1.2 Q2.2 R3.1 R5.2 R10.1 R15.2 R16.2 R27.2 RST1.1 SW1.1 SW2.1 SW3.1 U1.8 U1.23 U1.35 U1.47 U2.4 U3.3 U5.2 USB1.A1 USB1.A12 USB1.B1 USB1.B12 X1.2 X1.4 | length 2481.6
  Top Layer w10: v1(120,823) 120,845.39 SW2.1 ; SW1.1 120.18,1034.82 v1(121,1034) ; v1(151,1363) 204.37,1363 198,1356.63 v1(198,1340) ; C8.1 222,878.94 v1(222,852) ; R3.1 v1(255,1050.5) v1(321,1050.5) 351.5,1050.5 C5.1 ; v1(265,672) C11.1 ; v1(323,1534) C4.1 425,1534 441.42,1517.58 U1.35 441.21,1457.47 441.21,1385.21 v1(441,1385) ; C1.2 v1(378,948) 417,948 X1.2 ; U1.47 440.68,1207.68 v1(441,1208) ; X1.4 527,882 v1(563,882) C2.2 ; U1.8 560,1135.31 v1(560,1208) ; v1(597,672) C3.1 ; v1(619,1385) 691.26,1385 U1.23 ; C7.1 v1@755,1536 ; v1(755,1534) v1@755,1536 ; R5.2 786.5,1536 v1@755,1536 ; Q2.2@808.4,857.22 Q2.2 v1(828,871) ; v1(868,779) 888.2,779 Q1.2 ; C10.2 v1(870,1426) C14.1 ; v1(1111,1468) U3.3 1233,1468 1273.5,1427.5 R16.2 ; U2.4 v1(1263,1248) 1278,1248 C13.1 C22.1 ; USB1.A12@1246.06,1639.96 USB1.B1 ; v1(1403,1089) C23.1 ; C24.2 v1(1530,1295) ; U5.2 v1(1557,1192)
  Top Layer w20: v1(154,372) 153.96,372.04 RST1.1 ; USB1.A12@1202.95,1675.98 1202.95,1659.57 1222.56,1639.96 USB1.A12@1246.06,1639.96 ; 1227,799 1317.5,708.5 R27.2 ; R15.2 1456.5,1428 v1(1482,1428) ; USB1.A1@1509.84,1639.96 1526.93,1639.96 USB1.A1@1562.95,1675.98 ; RST1.1 RST1.1
  Top Layer w30: USB1.A1@1562.95,1675.98 1612.02,1675.98 1636,1652 L1.1
  Bottom Layer w20: v1(154,372) v1(154,609)
  other v1: 354,576 430.67,576 507.33,576 584,576 708,577 758,577 808,577 182,678 1045,756.67 689,770 1045,895 1045,979.33 433,1044 719,1092 775,1092 289,1184 1010,1232 1010,1294 1141,1303 1214,1303 811,1313 756,1385 85,1421 238,1534 902,1607 973,1607 85,1608 228,1639 449,1639 1078,1640 1078,1703.5 1554,1752 1078,1767 1376,1789
HV: C15.2 R1.1 R18.2 VD1.2 | length 282.3
  Top Layer w30: R18.2@2187.25,693.75 R18.2 2187.75,693.75 2187.75,617 2190.75,614 VD1.2 2313.33,613.83 2313.33,536.17 R1.1
NetB1_2: B1.2 Q1.3 | length 290
  Top Layer w20: Q1.3 1156.43,688 B1.2
NetC1_1: C1.1 U1.5 X1.3 | length 374.7
  Top Layer w10: C1.1@345,879 350,874 X1.3 425.94,874 471,919.06 471,1001 500.47,1030.47 U1.5
NetC2_1: C2.1 U1.6 X1.1 | length 260.2
  Top Layer w10: U1.6 520,1134.69 520,954 X1.1 594,953 C2.1@596,951
NetC9_2: C9.2 G1.2 R9.1 | length 816.2
  Top Layer w20: C9.2 666.81,700.25 733.28,700.25 R9.1
  Top Layer w30: G1.2@235.63,295 514.37,295 666.06,446.69 C9.2
NetC16_1: C16.1 U4.9 | length 88.4
  Top Layer w10: U4.9 2108.19,946.69 2121,959.5 C16.1
NetC17_1: C17.1 R20.2 | length 79.6
  Top Layer w20: R20.2 1588.75,951.75 1666.25,951.75 C17.1
NetC17_2: C17.2 U4.3 | length 119.4
  Top Layer w10: C17.2@1736,946 1755,927 U4.3
NetC20_2: C20.2 R18.1 RP1.1 RP1.2 U4.4 | length 707.7
  Top Layer w10: C20.2 1757.31,907.31 U4.4
  Top Layer w20: RP1.1 1735,794.37 ; C20.2 1735,885 1735,794.37 ; R18.1 1865.87,694 1828.33,731.54 1826.36,731.54 1804.87,753.03 RP1.2 1804.87,756.97 1783.37,778.46 1781.4,778.46 1765.5,794.37 1735,794.37
NetC21_2: C21.2 Q3.1 Q3.2 Q3.3 R22.2 U4.1 | length 597.5
  Top Layer w10: U4.1 1847.91,966 v2(1912,966) v2@1911.62,966.38
  Top Layer w20: v2@1911.62,966.38 1911.81,966.56 1911.81,1044.81 C21.2
  Bottom Layer w20: v2(1912,966) 1981,1035 v1(2337,1035)
NetC24_1: C24.1 U5.4 | length 77.6
  Top Layer w15: U5.4 1433,1229.4 C24.1
NetD1_A: D1.A R24.1 | length 56.6
  Top Layer w15: D1.A 2249.09,1824.41 2296.91,1824.41 R24.1
NetD1_K: D1.K U6.1 | length 106.4
  Top Layer w15: D1.K 2249.38,1757.31 2249.38,1660.2 2252.17,1657.4 U6.1
NetD2_A: D2.A R29.1 | length 58.7
  Top Layer w15: D2.A@2404,1823.32 2456.82,1823.32 R29.1
NetD2_K: D2.K U6.5 | length 183
  Top Layer w15: U6.5 2375,1620 2390,1635 2390,1749.67 2403.02,1762.69 D2.K@2404,1762.69
NetF1_1: F1.1 S1.1 | length 199.6
  Top Layer w40: S1.1 1878,1607 F1.1
NetG1_1: G1.1 R1.2 | length 519.7
  Top Layer w30: G1.1@2235.63,295 2386.5,295 ; R1.2 2386.5,295 ; G1.1@2514.37,295 2386.5,295
NetIC1_1: IC1.1 L2.1 VD4.1
NetIC1_3: IC1.3 R30.1 R31.2 | length 141.8
  Top Layer w15: IC1.3 2251.25,1364.88 R30.1 R31.2
NetLED1_2: LED1.2 R27.1 | length 93.6
  Top Layer w20: R27.1 1434,874.74 LED1.2
NetQ1_1: Q1.1 R7.1 | length 102.5
  Top Layer w20: Q1.1 R7.1
NetQ2_1: Q2.1 R9.2 R10.2 | length 171.9
  Top Layer w20: Q2.1 733.6,772.93 R9.2 806.5,772.5 R10.2
NetQ3_4: Q3.4 U4.8 | length 203.9
  Top Layer w10: U4.8 2154.5,927 Q3.4
NetQ3_5: Q3.5 Q3.6 Q3.7 Q3.8 T1.2 | length 420.5
  Top Layer w30: 2290,858 2425,858 2496.07,929.07 T1.2
NetR3_2: R3.2 U1.44 | length 241.4
  Top Layer w10: R3.2 222,1184 304.39,1266.39 368.24,1266.39 U1.44
NetR4_2: R4.2 U1.9 | length 217.3
  Top Layer w10: U1.9 579.21,1069.79 666,983 R4.2
NetR5_1: R5.1 U1.20 | length 216.7
  Top Layer w10: U1.20 691.76,1325.44 755.44,1325.44 788,1358 R5.1
NetR15_1: R15.1 USB1.A5 | length 151.4
  Top Layer w10: USB1.A5 1427.17,1540.83 1456,1512 R15.1
NetR16_1: R16.1 USB1.B5 | length 143.2
  Top Layer w10: R16.1 1309.06,1509.56 USB1.B5
NetR17_2: R17.2 R19.2 U4.2 | length 213.3
  Top Layer w10: R17.2 R19.2 1780,1040.63 1780,973 1806.12,946.88 1847.35,946.88 U4.2
NetR21_2: R21.2 U4.6 | length 96
  Top Layer w10: R21.2 1984.75,819 2040.46,874.7 U4.6
NetR23_2: R23.2 RP1.3 | length 76.3
  Top Layer w20: R23.2 1589.43,717.07 1661.7,717.07 RP1.3
NetR26_1: R26.1 U6.6 | length 97.2
  Top Layer w15: U6.6@2347.12,1657.52 R26.1@2347.12,1754.38
  Top Layer w20: U6.6@2347.12,1657.52 U6.6 ; R26.1 R26.1@2350.12,1754.38
NetS1_2: S1.2 VD2.2 VD3.2 | length 427.6
  Top Layer w50: VD2.2 VD3.2 1799.13,1497.68 1799.13,1790.87 S1.2
NetT1_3: T1.3 VD1.1 | length 156.8
  Top Layer w30: VD1.1 2464.74,614 2496.07,645.33 T1.3
OLED_CS: OLED1.7 U1.25 | length 437
  Top Layer w10: U1.25 638.27,1524.27 779,1665 863.74,1665 OLED1.7
OLED_DC: OLED1.6 U1.29 | length 459.8
  Top Layer w10: U1.29 559.53,1518.27 572.81,1531.55 572.81,1601.19 v1(569.41,1604.59)
  Bottom Layer w10: v1(569.41,1604.59) 703.34,1604.59 OLED1.6
OLED_RST: OLED1.5 U1.32 | length 498.5
  Top Layer w10: v1(488,1561) 488,1558 500.47,1545.53 U1.32
  Bottom Layer w10: v1(488,1561) 488,1591 526,1629 693,1629 725,1661 OLED1.5 OLED1.5@696.26,1726.26
RESET: C3.2 R2.2 RST1.2 U1.7 | length 1198.7
  Top Layer w10: RST1.2 159.93,505.93 265,611 595,611 632,648 632,769 ; R2.2 532.5,769 C3.2 632,769 ; U1.7 539.84,1073.16 632,981 632,769
RX: U1.31 U3.6 | length 628
  Top Layer w10: v1(520,1582) 520,1457.84 U1.31 ; v1(925,1467) 925.5,1467.5 975.01,1467.5 U3.6
  Bottom Layer w10: v1(520,1582) 520.22,1581.78 578.85,1581.78 578.91,1581.84 810.16,1581.84 v1(925,1467)
SPI2_CLK: OLED1.3 U1.26 | length 322.4
  Top Layer w10: U1.26 619,1458.09 618,1459.09 619,1460.09 v1(619,1656)
  Bottom Layer w10: OLED1.3 595.26,1656 v1(619,1656)
SPI2_MOSI: OLED1.4 U1.28 | length 287.5
  Top Layer w10: U1.28 579.21,1511.21 595.19,1527.19 595.19,1696.45 OLED1.4
SW1: C8.2 R8.2 SW1.2 U1.41 | length 643.2
  Top Layer w10: SW1.2 159.93,1215.93 269.79,1325.79 U1.41 ; C8.2 C8.2@222,948.06 ; v1(222,975) C8.2@222,948.06 ; R8.2 224.44,950.5 C8.2@222,948.06
  Bottom Layer w10: v1(120,1194) 120,1077 v1(222,975)
SW2: C11.2 R11.2 SW2.2 U1.42 | length 840.9
  Top Layer w10: v1(120,959) 120,980.75 120.18,980.93 131.93,980.93 165,1014 165,1189 282.1,1306.1 U1.42 ; v1(239,769) C11.2 329.5,769 R11.2
  Bottom Layer w10: v1(120,959) 120,888 v1(239,769)
SW3: C12.2 R12.2 SW3.2 U1.43 | length 1123.3
  Top Layer w10: v1(120,721) 120,742.75 SW3.2 131.99,742.93 186,796.94 186,1178 294.42,1286.42 U1.43 ; v1(398,797) C12.2 461.46,769 R12.2
  Bottom Layer w10: v1(120,721) 322,721 v1(398,797)
SWCLK: JP1.3 U1.37 | length 162.8
  Top Layer w10: JP1.3@206.05,1405.11 206.63,1404.53 U1.37
SWDIO: JP1.2 U1.34 | length 553.1
  Top Layer w10: JP1.2@206,1443.37 162.63,1443.37 142,1464 142,1512.25 201.75,1572 417,1572 461.1,1527.9 U1.34
TX: U1.30 U3.7 | length 581.7
  Top Layer w10: U1.30 539.84,1545.16 550,1555.31 v1(550,1556) ; v1@930,1419 930.5,1418.5 975.01,1418.5 U3.7
  Bottom Layer w10: v1(550,1556) 551.81,1557.81 786.19,1557.81 v1(925,1419)
UD_N: R14.2 U3.2 | length 282.5
  Top Layer w10: U3.2 1193.65,1418 1208.65,1403 1243.28,1403 1279.28,1367 1352.14,1367 1368,1382.86 1368,1407.25 1352,1423.25 R14.2
UD_P: R13.2 U3.1 | length 315.6
  Top Layer w10: U3.1 1193.65,1368 1208.65,1383 1235,1383 1271,1347 1360.43,1347 1388,1374.57 1388,1407.25 1404,1423.25 R13.2
VBAT: BT1.1 C26.2 R25.2 U6.3 VD3.1 | length 209
  Top Layer w20: v1(1717,1147) 1717,1115.75 R25.2
  Bottom Layer w20: v1(1717,1147) 1747,1177 v1@1747,1312
  other v1: 1747,1287 1747,1317 1747,1347
VBAT_MEA: C27.2 R25.1 R28.2 U1.13 | length 1086.1
  Top Layer w10: U1.13 758.01,1187.99 903.5,1042.5 R28.2 R25.1
VCC: C23.2 C29.2 F1.2 IC1.4 IC1.5 L2.2 U5.1 U5.3 | length 221.7
  Top Layer w15: C23.2 1502,1151.1 U5.1@1505.5,1154.6 ; U5.1 U5.1@1505.5,1154.6 ; U5.3 1479.72,1229.4 1468,1217.69 1468,1167 1480.4,1154.6 U5.1@1505.5,1154.6
VUSB: C25.2 R24.2 R29.2 U6.4 USB1.A4 USB1.A9 USB1.B4 USB1.B9 VD2.1 | length 289.5
  Top Layer w15: R24.2 2300,1601 2318.4,1582.6 U6.4 2423.6,1582.6 C25.2@2427,1586
  other v1: 1283,1555 1472,1556 1283,1582 1472,1582 2487,1673 2487,1703 2487,1733
W25Q_CLK: U1.15 U2.6 | length 241.4
  Top Layer w10: U1.15 818.64,1227.36 848,1198 U2.6
W25Q_CS: U1.14 U2.1 | length 571.4
  Top Layer w10: U1.14 797.32,1207.68 v1(835,1170) ; v1@1171,1098 v1(1173,1098) U2.1
  Bottom Layer w10: v1(835,1170) 907,1098 v1@1171,1098
W25Q_MISO: U1.16 U2.2 | length 567
  Top Layer w10: U1.16 845.95,1247.05 v1(863,1230) ; v1(1173,1148) U2.2
  Bottom Layer w10: v1(863,1230) 945,1148 v1(1173,1148)
W25Q_MOSI: U1.17 U2.5 | length 255.8
  Top Layer w10: U1.17 692.15,1266 693.15,1267 877,1267 896,1248 U2.5 U2.5@938.65,1248
pads on no net: IC1.6 JP1.0 RST1.0 S1.3 S1.4 S1.5 SW1.0 SW2.0 SW3.0 T1.NC U1.2 U1.3 U1.4 U1.10 U1.18 U1.19 U1.21 U1.22 U1.27 U1.33 U1.38 U1.39 U1.40 U1.45 U1.46 U3.4 USB1.1 USB1.A8 USB1.B8

## Polygon pours and split planes (outlines as drawn)
GND on Top Layer "Top Layer-GND1" (solid, remove dead copper, pour order 52): 0,1651 153,1651 254,1752 254,1891 1571,1891 1571,1059 1293,1059 1293,737 1294,736 826,736 826,550 14,550 0,564
AGND on Top Layer "Top Layer-AGND" (solid, remove dead copper, pour order 51): 1589,1894 2756,1894 2756,782 2132,782 2132,697 1571,697 1547,721 1547,1112 1589,1154
VCC on Top Layer "Top Layer-VCC 1" (solid, remove dead copper, pour order 40): 1486,1219 1851,1219 1881,1249 1881,1420 1930,1469 1968,1469 1969,1468 1969,1527 1930,1527 1846,1443 1846,1266 1820,1240 1486,1240
5V on Top Layer "Top Layer-5V 1" (solid, remove dead copper, pour order 47): 2026,1060 2026,961 2056,961 2056,1060
NetC21_2 on Top Layer "Top Layer-NetC21_2" (solid, remove dead copper, pour order 48): 2315,1110 2315,1010 2265,1010 2265,970 2375,970 2375,1010 2360,1010 2360,1110
VBAT on Top Layer "Top Layer-VBAT" (solid, remove dead copper, pour order 49): 1833,1359 1833,1274 1742,1274 1735,1281 1735,1351 1743,1359
5V on Top Layer "Top Layer-5V" (solid, remove dead copper, pour order 46): 2111,1217 2226,1217 2232,1223 2278,1223 2278,1273 2338,1333 2338,1375 2303,1375 2303,1338 2271,1306 2132,1306 2111,1285
VBAT on Top Layer "Top Layer-VBAT 1" (solid, remove dead copper, pour order 39): 2045,1651 2045,1592 2067,1570 2274,1570 2274,1595 2192,1595 2192,1644 2111,1644 2104,1651
VUSB on Top Layer "Top Layer-VUSB" (solid, remove dead copper, pour order 45): 2445,1774 2477,1774 2507,1744 2507,1598 2477,1568 2412,1568 2412,1602 2452,1602 2467,1617 2467,1714 2445,1736
VUSB on Top Layer "Top Layer-VUSB 3" (solid, remove dead copper, pour order 41): 1461,1582 1557,1582 1598,1541 1598,1393 1631,1360 1699,1360 1699,1275 1630,1275 1547,1358 1547,1519 1522,1544 1461,1544
NetIC1_1 on Top Layer "Top Layer-NetIC1_1" (solid, remove dead copper, pour order 38): 1930,1382 1930,1217 2017,1217 2017,1312 2047,1342 2118,1342 2118,1382
VCC on Top Layer "Top Layer-VCC" (solid, remove dead copper, pour order 37): 1959,1623 1959,1556 1930,1527 1930,1469 2028,1469 2028,1500 2038,1510 2125,1510 2136,1499 2136,1462 2203,1462 2277,1462 2277,1520 2249,1548 2012,1548 1999,1561 1999,1623
AGND on Top Layer "Top Layer-AGND 1" (solid, remove dead copper, pour order 36): 1523,616 1589,550 2022,550 2022,604 1599,604 1561,642 1561,1125 1523,1087
VUSB on Top Layer "Top Layer-VUSB 1" (solid, remove dead copper, pour order 21): 1461,1668.5 1461,1551.5 ccw(c1469,1551.5) 1469,1543.5 1477,1543.5 ccw(c1477,1550.5) 1484,1550.5 1484,1668.5
VUSB on Top Layer "Top Layer-VUSB 2" (solid, remove dead copper, pour order 17): 1272,1668 1272,1551 ccw(c1280,1551) 1280,1543 1288,1543 ccw(c1288,1550) 1295,1550 1295,1668
GND on Bottom Layer "Top Layer-GND" (solid, remove dead copper, pour order 53): 0,1651 153,1651 254,1752 254,1891 1571,1891 1571,1059 1293,1059 1293,737 1294,736 826,736 826,550 14,550 0,564
AGND on Bottom Layer "Top Layer-AGND1" (solid, remove dead copper, pour order 50): 1588,1894 2756,1894 2756,782 2132,782 2132,697 1571,697 1547,721 1547,1112 1588,1153
VBAT on Bottom Layer "Bottom Layer-VBAT" (solid, remove dead copper, pour order 44): 2045,1651 2045,1593 1977,1525 1827,1525 1732,1430 1732,1286 1744,1274 1772,1274 1772,1406 1851,1485 2001,1485 2103,1587 2103,1651
VUSB on Bottom Layer "Bottom Layer-VUSB 1" (solid, remove dead copper, pour order 42): 1272,1594 1947,1594 1985,1632 1985,1749 2042,1806 2456,1806 2507,1755 2507,1669 2498,1660 2476,1660 2467,1669 2467,1736 2436,1767 2061,1767 2028,1734 2028,1612 1960,1544 1272,1544

## Keep-outs
Keep-Out Layer:
  circle w10: c2637.8,1771.65 r59.06
  circle w10: c2637.8,118.11 r59.06
  circle w10: c118.11,118.11 r59.06
  circle w10: c118.11,1771.65 r59.06
  lines w10: 115,1889.76 2635.05,1889.76 ; 116.26,0 119.92,0 ; 124.9,1889.57 ccw(c118.11,1771.65) 0,1771.26 0,116.26 ccw(c118.11,118.11) 119.92,0 ; 2635.05,1888.95 cw(c2637.8,1771.65) 2755.12,1771.65 ; 2755.91,1771.65 2755.91,114.98 cw(c2637.8,118.11) 2635.02,0 119.92,0

## Silkscreen, mask and mechanical layers (free items; w line width, h text height)
Top Overlay:
  drawing of 482 lines, arcs and shapes, not listed
  text "DC" at 842.17,1805 h60 r90
  text "CS" at 942,1805 h60 r90
  text "RST" at 742.33,1795 h60 r90
  text "GND" at 343,1790 h60 r90
  text "VCC" at 442.83,1790 h60 r90
  text "SCK" at 542.67,1790 h60 r90
  text "MOSI" at 642.5,1781.26 h60 r90
  text "OFF" at 1696,1650 h60
  text "ON" at 1824,1650 h60
  text "电源" at 1586,1646 h60
  text "VCC" at 245,1469 h50
  text "IO" at 245,1429.7 h50
  text "CLK" at 245,1390.3 h50
  text "GND" at 245,1351 h50
  text "高压电容" at 1691,550 h60
  text "V2.2.1" at 2705,241.26 h60 r90

## Text inside footprints (layer, text, board x,y; h text height)
BT1: Top Overlay "+" at 2096,1532 h45.28 r90
G1: Top Overlay "СИ3БГ" at 1093,233 h200; Top Overlay "+" at 2060,250 h200